# Altium PCB frm-mw-diode-detector.PcbDoc
Units mil, origin at the board's own origin, x right, y up, seen from the top; angles counter-clockwise.
Board outline 1062.99 x 1417.32 mil, 2 copper layers (Top Layer, Bottom Layer), stack 61.756 mil thick; 43 components, 25 nets, 120 pads, 104 vias.
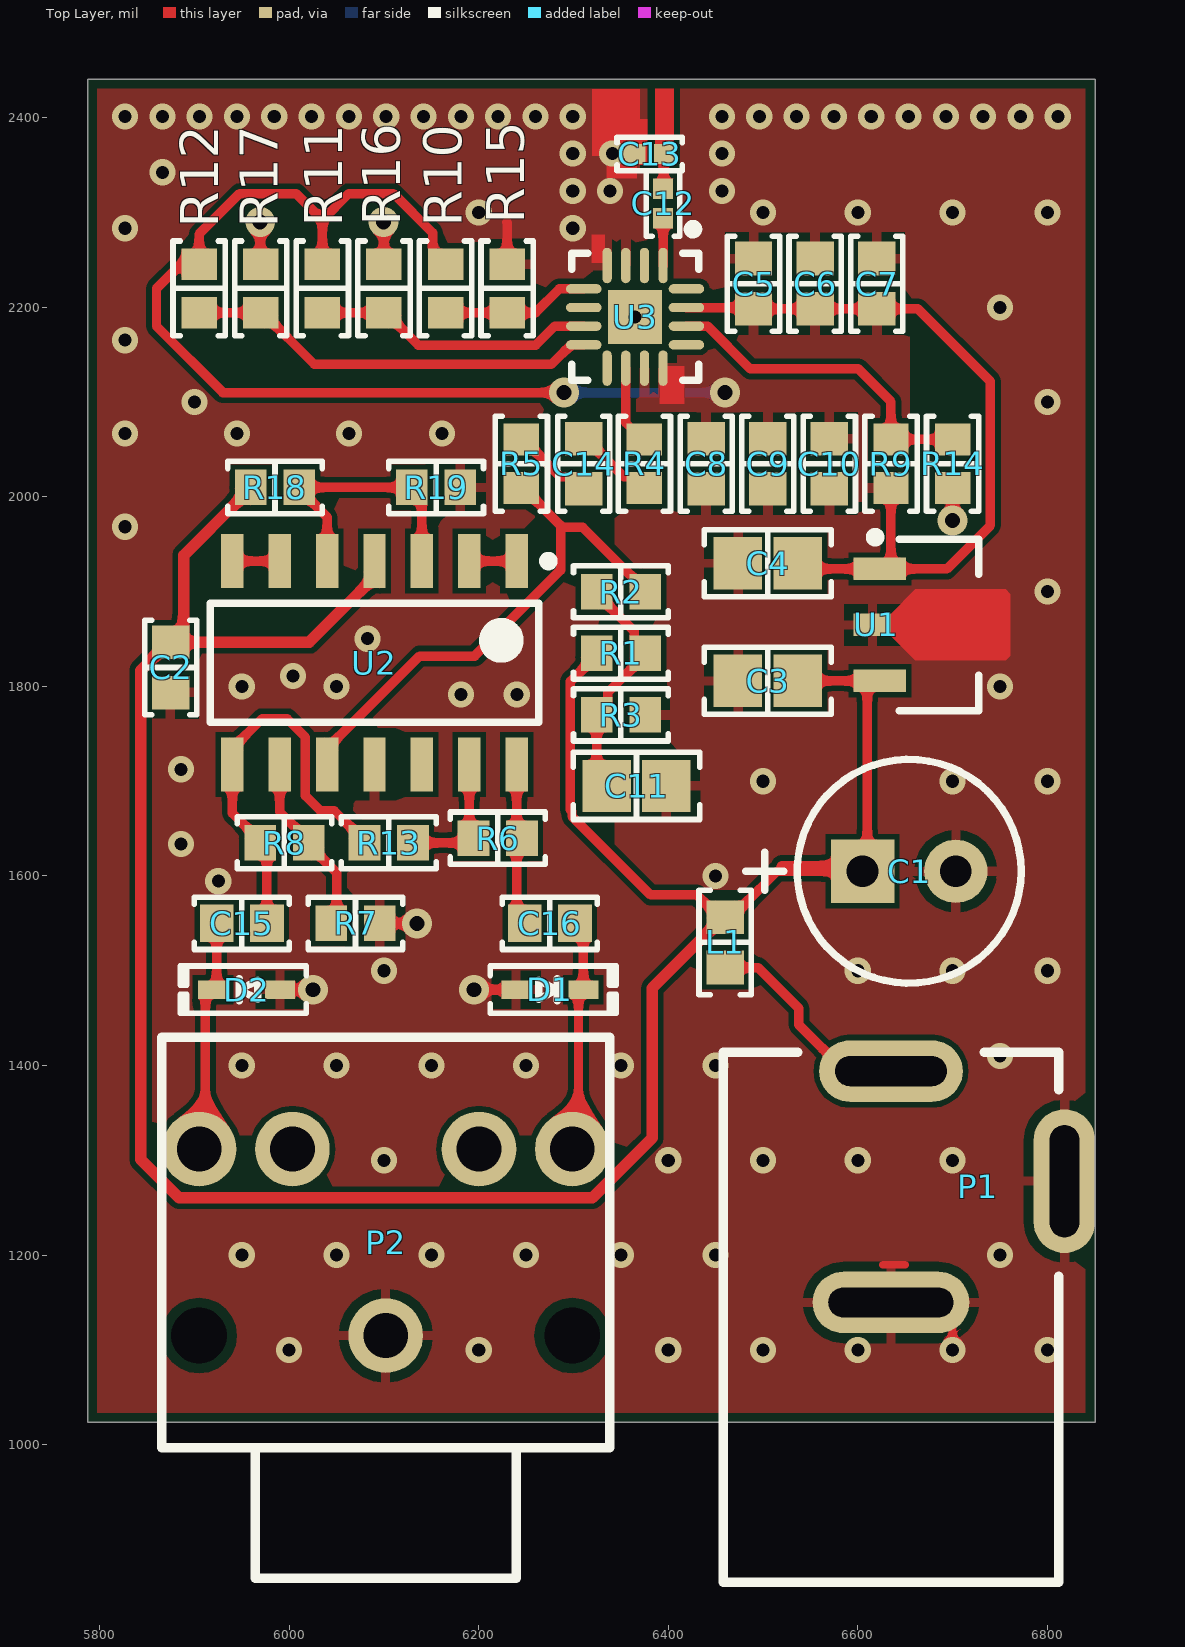
[diagram p0: Top Layer view]
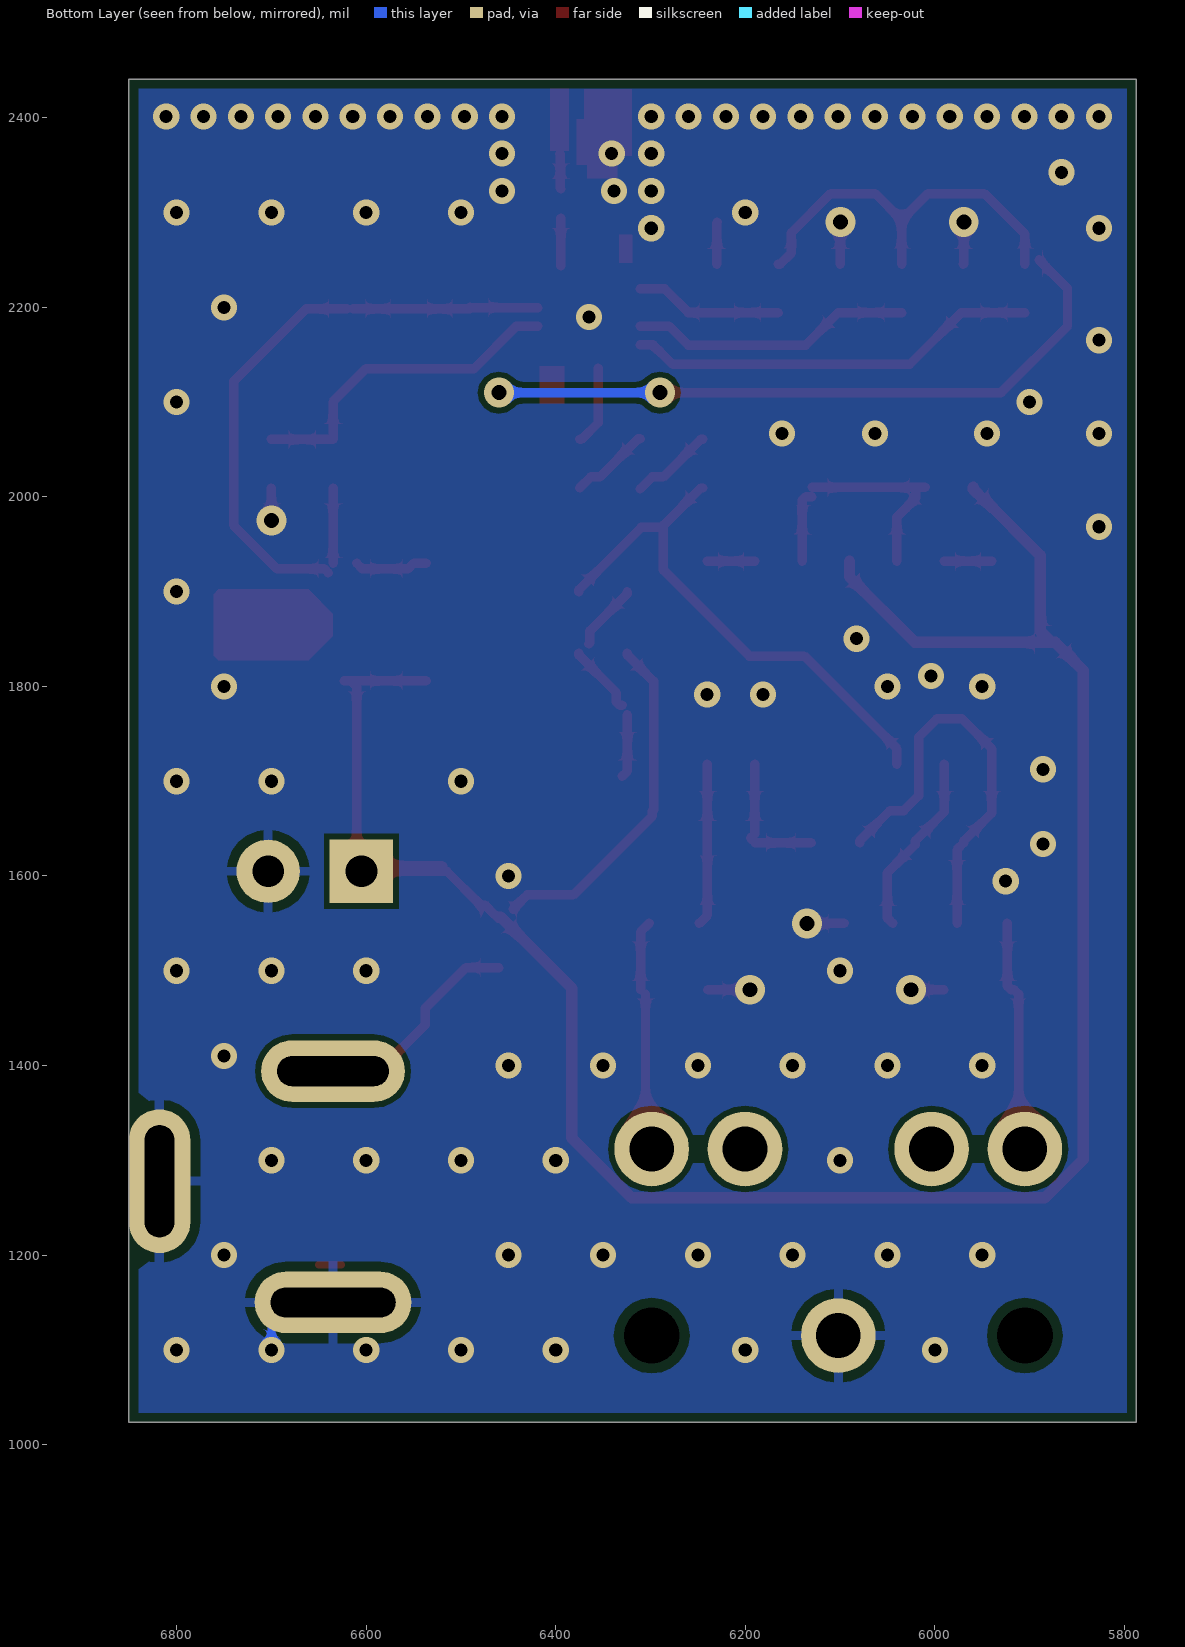
[diagram p1: Bottom Layer view, seen from below]
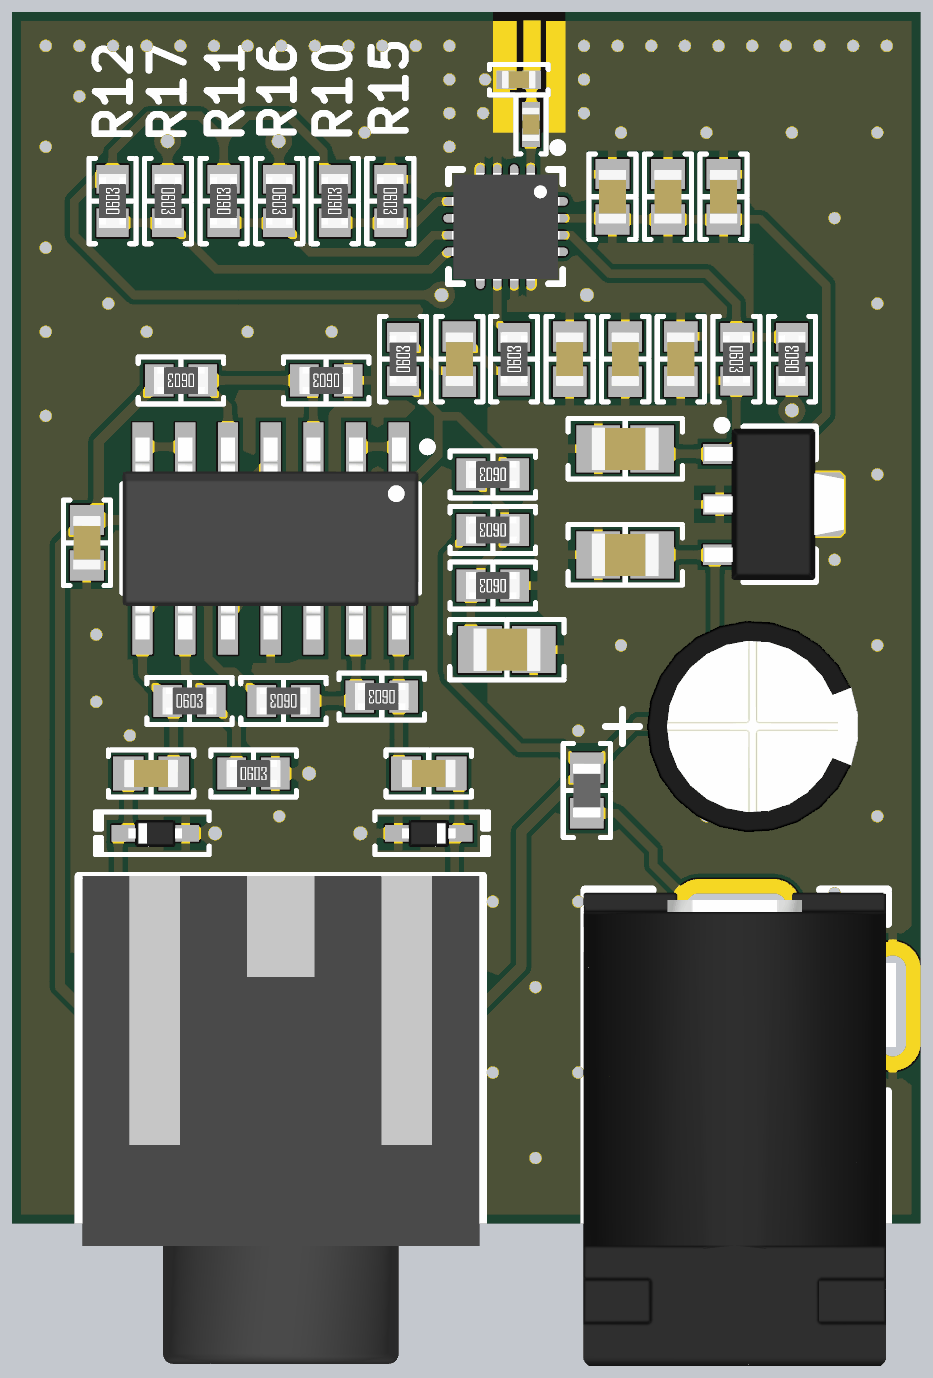
[diagram p2: 3D render of the assembled board from above, using the file's embedded part models]

## Layer stack, top to bottom
Top Solder: solder mask 1, SM-001, Dk 4
Top Layer: signal copper 1.3779
Dielectric 1: core 59, Core-043, Dk 4.3
Bottom Layer: signal copper 1.3779
Bottom Solder: solder mask 1, SM-001, Dk 4

## Board outline
5787.4,1023.62 5787.4,2440.94 6850.39,2440.94 6850.39,1023.62

## Design rules (kind name [scope] priority, off if disabled: settings)
BoardOutlineClearance [All] p1: gap=10 ignorepadtopadclearanceinfootprint=FALSE
Clearance [All] p1: gap=6 ignorepadtopadclearanceinfootprint=TRUE
FanoutControl Fanout_LCC [All] p1 off: bgadir=Out bgaviamode=Centered fanoutstyle=Auto fanoutdirection=Alternating viagrid=1 // Protel DXP Scope 1 Expression Was: IsLCC   Fanout_LCC (Default Rule)
FanoutControl Fanout_BGA [All] p2 off: bgadir=Out bgaviamode=Centered fanoutstyle=Auto fanoutdirection=Alternating viagrid=1 // Protel DXP Scope 1 Expression Was: IsBGA   Fanout_BGA (Default Rule)
FanoutControl Fanout_SOIC [All] p3 off: bgadir=Out bgaviamode=Centered fanoutstyle=Auto fanoutdirection=Alternating viagrid=1 // Protel DXP Scope 1 Expression Was: IsSOIC   Fanout_SOIC (Default Rule)
FanoutControl Fanout_Default [All] p4: bgadir=Out bgaviamode=Centered fanoutstyle=Auto fanoutdirection=Alternating viagrid=1 // Fanout_Default (Default Rule)
FanoutControl Fanout_Small [All] p5 off: bgadir=Out bgaviamode=Centered fanoutstyle=Auto fanoutdirection=Alternating viagrid=1 // Protel DXP Scope 1 Expression Was: (CompPinCount < 5)   Fanout_Small (Default Rule)
HoleSize [All] p1: absolutevalues=TRUE maxlimit=248.03 minlimit=11.81 maxpercent=80.000 minpercent=20.000
HoleToHoleClearance HoleToHoleClearanceVia [IsVia vs IsVia] p1: gap=8 allowstackedmicrovias=TRUE
HoleToHoleClearance [not IsVia vs not IsVia] p2: gap=10 allowstackedmicrovias=TRUE
MinimumAnnularRing [All] p1: minimumring=6
MinimumSolderMaskSliver [All] p1 off: minsoldermaskwidth=8
PolygonConnect [All] p1: thpad.connectstyle=Relief thpad.reliefconductorwidth=10 thpad.reliefentries=4 thpad.polygonreliefangle="90 Angle" thpad.airgapwidth=10 smdpad.connectstyle=Relief smdpad.reliefconductorwidth=10 smdpad.reliefentries=4 smdpad.polygonreliefangle="90 Angle" smdpad.airgapwidth=10 via.connectstyle=Direct via.reliefconductorwidth=10 via.reliefentries=4 via.polygonreliefangle="90 Angle" via.airgapwidth=10
RoomDefinition frm-mw-diode-detector [InComponentClass('frm-mw-diode-detector')] p1: confinementstyle=ConfineIn formatcopy=TRUE lockcomponents=FALSE outline 0,0 2000,0 2000,1000 0,1000
RoutingVias [All] p1: holewidth=15.75 width=31.5 viastyle="Through Hole" minholewidth=13.78 minwidth=27.56 maxholewidth=39.37 maxwidth=50
SilkToSilkClearance [All] p1: silktosilkclearance=7.87
SilkToSolderMaskClearance [All] p1 off: minsilkscreentomaskgap=10 clearancetoexposedcopper=TRUE // Protel DXP Scope 1 Expression Was: IsPad
SolderMaskExpansion [All] p1: expansion=2
UnRoutedNet [All] p1: checkbadconnections=TRUE
Width [All] p1: maxlimit=200 minlimit=6 preferedwidth=8
19 further rules are at their usual default settings.

## Classes and differential pairs
component class frm-mw-diode-detector: C1 C2 C3 C4 C5 C6 C10 C11 C14 C16 D1 D2 L1 P1 P2 R1 R2 R3 R4 R5 R6 R7 R9 R10 R13 R14 R15 R17 R18 U1 U2 U3

## Components (designator, comment, footprint, x,y, rotation, side; value= is the part's Value field where it differs from the comment)
C1 "220uF" 3924B366-8672-45E9-B0BE-62DACC24E783 6605,1605 r0 top
C2 "100nF" "CAP 0603_1608" 5875,1820 r90 top
C3 "10uF" "CAP 0805_2012" 6505,1805.94 r0 top
C4 "10uF" "CAP 0805_2012" 6505,1930 r0 top
C5 "10pF" "CAP 0603_1608" 6490,2225 r90 top
C6 "100pF" "CAP 0603_1608" 6555,2225 r90 top
C7 "1nF" "CAP 0603_1608" 6620,2225 r90 top
C8 "10pF" "CAP 0603_1608" 6440,2035 r270 top
C9 "100pF" "CAP 0603_1608" 6505,2035 r270 top
C10 "1nF" "CAP 0603_1608" 6570,2035 r270 top
C11 "10uF" "CAP 0805_2012" 6366.5,1695 r0 top
C12 "0.1pF" "CAP 0402_1005 RF" 6394.61,2309.61 r270 top
C13 "0.1pF" "CAP 0402_1005 RF" 6380.35,2362 r0 top
C14 "100nF" "CAP 0603_1608" 6310.87,2035 r270 top
C15 "100nF" "CAP 0603_1608" 5950,1550 r180 top
C16 "100nF" "CAP 0603_1608" 6275,1550 r0 top
D1 "3.3V" SOD523F 6275,1480 r0 top
D2 "3.3V" SOD523F 5955,1480 r180 top
L1 "BLM18BD252SN1D" "FER 0603_1608" 6460,1530 r90 top
P1 "DC-005A-20A" F0972D8A-C5C0-4A84-836D-A9666EE65C2D 6635,1394.09 r90 top
P2 "PJ-3900-04" 7EF2B92C-0FC9-4C85-B662-5CEC65BFCCC4 6101.85,1115 r90 top
R1 "1K" "RES 0603_1608" 6350,1835 r180 top
R2 "100K" "RES 0603_1608" 6350,1900 r180 top
R3 "1K" "RES 0603_1608" 6350,1770 r180 top
R4 "0" "RES 0603_1608" 6374.84,2035 r90 top
R5 "10K" "RES 0603_1608" 6245,2035 r90 top
R6 "10K" "RES 0603_1608" 6220,1640 r180 top
R7 "10K" "RES 0603_1608" 6070,1550 r0 top
R8 "100K" "RES 0603_1608" 5995,1635 r0 top
R9 "10K" "RES 0603_1608" 6635,2035 r270 top
R10 "10K" "RES 0603_1608" 6165,2220 r90 top
R11 "10K" "RES 0603_1608" 6035,2220 r90 top
R12 "10K" "RES 0603_1608" 5905,2220 r90 top
R13 "100K" "RES 0603_1608" 6105,1635 r180 top
R14 "10K" "RES 0603_1608" 6700,2035 r90 top
R15 "10K" "RES 0603_1608" 6230,2220 r270 top
R16 "10K" "RES 0603_1608" 6100,2220 r270 top
R17 "10K" "RES 0603_1608" 5970,2220 r270 top
R18 "1K" "RES 0603_1608" 5985,2010 r180 top
R19 "1K" "RES 0603_1608" 6155,2010 r180 top
U1 "AS78L05RTR-E1" E733EFB9-FE91-4AE9-9197-29251971C3DC 6695,1865 r0 top
U2 "LM324DT" 34355DA5-B1DA-47C2-A88A-ECF82120A4F7 6090,1825 r270 top
U3 "LTC5564HUD" 1C9CA8C2-7F7E-4E2B-A488-6DD37E6BADEA 6365,2190 r270 top

## Footprints (in the part's own frame and the unit in brackets; to place one, negate y for a bottom-side part, rotate by r counter-clockwise, add the part's x,y. Pads: shape width x height; smd on the part's side, far side on the other; paste and mask are expansions set on the pad)
1C9CA8C2-7F7E-4E2B-A488-6DD37E6BADEA [mm] "QFN, 16-Leads, Body 3.00x3.00mm, Pitch 0.50mm, Thermal Pad 1.45x1.45mm, IPC Medium Density"
  oval 0.95x0.25 smd: 1(-1.375,0.75) 2(-1.375,0.25) 3(-1.375,-0.25) 4(-1.375,-0.75) 9(1.375,-0.75) 10(1.375,-0.25) 11(1.375,0.25) 12(1.375,0.75)
  oval 0.25x0.95 smd: 5(-0.75,-1.375) 6(-0.25,-1.375) 7(0.25,-1.375) 8(0.75,-1.375) 13(0.75,1.375) 14(0.25,1.375) 15(-0.25,1.375) 16(-0.75,1.375)
  rect 1.45x1.45 smd: 17(0,0)
  silkscreen extent -2.47,-1.7 1.7,1.7, body extent -1.6,-1.6 1.6,1.6, height 0.8
7EF2B92C-0FC9-4C85-B662-5CEC65BFCCC4 [mm]
  round 0 hole 1.5 unplated: 1(0,5) 1(0,-5)
  round 2 hole 1.2: 1(0,0) 2(5,5) 3(5,-5) 4(5,2.5) 5(5,-2.5)
  silkscreen extent -6.5,-6 8,6, body extent -6.5,-5.9 8,5.9, height 9
3924B366-8672-45E9-B0BE-62DACC24E783 [mm]
  rect 1.7x1.7 hole 0.85: 1(0,0)
  round 1.7 hole 0.85: 2(2.5,0)
  silkscreen extent -3.13,-3 4.25,3, body extent -1.9,-3.15 4.4,3.15, height 11
34355DA5-B1DA-47C2-A88A-ECF82120A4F7 [mm] "SOIC, 14-Leads, Body 8.65x3.90mm, Pitch 1.27mm, IPC Medium Density"
  rect 1.45x0.6 smd: 1(-2.725,3.81) 2(-2.725,2.54) 3(-2.725,1.27) 4(-2.725,0) 5(-2.725,-1.27) 6(-2.725,-2.54) 7(-2.725,-3.81) 8(2.725,-3.81) 9(2.725,-2.54) 10(2.725,-1.27) 11(2.725,0) 12(2.725,1.27) 13(2.725,2.54) 14(2.725,3.81)
  silkscreen extent -2.85,-4.4 1.6,4.79, body extent -3,-4.4 3,4.4, height 1.75
"CAP 0402_1005 RF" [mm] "Chip Capacitor, 2-Leads, Body 1.02x0.51mm, IPC High Density"
  rect 0.55x0.54 smd: 1(-0.39,0) 2(0.39,0)
  silkscreen extent -0.87,-0.45 0.87,0.45, body extent -0.5,-0.26 0.5,0.26, height 0.52
"CAP 0603_1608" [mm] "Chip Capacitor, 2-Leads, Body 1.60x0.80mm, IPC Medium Density"
  rect 0.9x1 smd: 1(-0.675,0) 2(0.675,0)
  silkscreen extent -1.27,-0.7 1.27,0.7, body extent -0.8,-0.41 0.8,0.41, height 0.82
"CAP 0805_2012" [mm] "Chip Capacitor, 2-Leads, Body 2.00x1.20mm, IPC Medium Density"
  rect 1.3x1.4 smd: 1(-0.8,0) 2(0.8,0)
  silkscreen extent -1.7,-0.9 1.7,0.9, body extent -1,-0.64 1,0.64, height 1.26
E733EFB9-FE91-4AE9-9197-29251971C3DC [mm]
  rect 1.4x0.6 smd: 1(-1.823,1.5) 3(-1.823,-1.5)
  rect 1x0.6 smd: 2(-2.023,0)
  Top Layer region: -1.523,0.3 -0.873,0.95 1.552,0.95 1.678,0.825 1.678,-0.825 1.552,-0.95 -0.873,-0.95 -1.523,-0.3
  silkscreen extent -2.07,-2.3 0.83,2.47, body extent -2.47,-2.25 1.68,2.25, height 1.5
F0972D8A-C5C0-4A84-836D-A9666EE65C2D [mm]
  oval 1.65x3.85 hole 0.8 slot 3 at 90 deg: 1(0,0)
  oval 1.65x4.2 hole 0.8 slot 3.35 at 90 deg: 2(-6.2,0)
  oval 3.85x1.65 hole 0.8 slot 3 at 0 deg: 3(-2.95,-4.65)
  silkscreen extent -13.7,-4.5 0.5,4.5, body extent -13.67,-4.75 0.43,4.55, height 10.9
"FER 0603_1608" [mm] "Chip Ferrite, 2-Leads, Body 1.60x0.80mm, IPC Medium Density"
  rect 0.9x1 smd: 1(-0.675,0) 2(0.675,0)
  silkscreen extent -1.4,-0.7 1.4,0.7, body extent -0.8,-0.41 0.8,0.41, height 0.82
"RES 0603_1608" [mm] "Chip Resistor, 2-Leads, Body 1.60x0.80mm, IPC Medium Density"
  rect 0.85x0.95 smd: 1(-0.65,0) 2(0.65,0)
  silkscreen extent -1.27,-0.7 1.27,0.7, body extent -0.8,-0.4 0.8,0.4, height 0.45
SOD523F [mm] "SODFL, 2-Leads, Body 0.80x1.60mm, IPC Medium Density"
  rect 0.8x0.5 smd: 1(0.9,0) 2(-0.9,0)
  silkscreen extent -1.6,-0.64 1.8,0.64, body extent -0.8,-0.4 0.8,0.4, height 0.65

## Part data
C1: library part 1a28df19-6d3e-4a71-836c-f22920f8e8ab, "CAP  THT ELEC 220uF 25V 20%", Manufacturer 1=Rubycon, Manufacturer Part Number 1=25PK220MEFC-6.3*11, ComponentLink1Description=Datasheet, ComponentLink1URL="http://localhost:8080/static/files/Rubycon-220uF-25V_C109337_12019-03-10_214953.757848.pdf?Rubycon-220uF-25V_C109337 (1).pdf", id=14782, Part Number=1a28df19-6d3e-4a71-836c-f22920f8e8ab
C2 C14 C15 C16: library part 02841f84-ac15-41b5-9e17-915f8f067828, "CAP SMD MLCC 100nF 25V 0603 X7R", Manufacturer 1="Samsung Electro-Mechanics", Manufacturer Part Number 1=CL10B104KA8NNNC, ComponentLink1Description=Datasheet, ComponentLink1URL=http://localhost:8080/static/files/Samsung-Electro-Mechanics-CL10B104KA8NNNC_C15902019-03-10_215548.826887.pdf?Samsung-Electro-Mechanics-CL10B104KA8NNNC_C1590.pdf, id=14784, Part Number=02841f84-ac15-41b5-9e17-915f8f067828
C3 C4 C11: library part 1ffbe5a9-0884-4740-bdad-20a6a98400e6, "CAP SMD MLCC 10uF 25V 0805 X5R", Manufacturer 1="Samsung Electro-Mechanics", Manufacturer Part Number 1=CL21A106KAYNNNE, ComponentLink1Description=Datasheet, ComponentLink1URL=http://localhost:8080/static/files/Samsung-Electro-Mechanics-CL21A106KAYNNNE_C158502019-03-10_213827.610739.pdf?Samsung-Electro-Mechanics-CL21A106KAYNNNE_C15850.pdf, id=14779, Part Number=1ffbe5a9-0884-4740-bdad-20a6a98400e6
C5 C8: library part b659b677-71ac-4e84-9ac8-47a475f18d31, "CAP SMD MLCC 10pF 50V 0603 C0G/NP0", Manufacturer 1=Yageo, Manufacturer Part Number 1=CC0603GRNPO9BN100, id=14805, Part Number=b659b677-71ac-4e84-9ac8-47a475f18d31
C6 C9: library part ccf679fd-1b09-4431-be81-04c3ce295510, "CAP SMD MLCC 100pF 100V 0603 C0G/NP0", Manufacturer 1=Yageo, Manufacturer Part Number 1=CC0603JRNPO0BN101, id=14804, Part Number=ccf679fd-1b09-4431-be81-04c3ce295510
C7 C10: library part 0eca2548-3630-4fea-a3d5-94248c1cae74, "CAP SMD MLCC 1nF 50V 0603 X7R", Manufacturer 1="Samsung Electro-Mechanics", Manufacturer Part Number 1=CL10B102KB8NNNC, ComponentLink1Description=Datasheet, ComponentLink1URL="http://localhost:8080/static/files/Samsung-Electro-Mechanics-CL10B102KB8NNNC_C1588_12019-03-10_215732.131818.pdf?Samsung-Electro-Mechanics-CL10B102KB8NNNC_C1588 (1).pdf", id=14785, Part Number=0eca2548-3630-4fea-a3d5-94248c1cae74
C12 C13: library part 26a1b8a5-3146-4e38-b8a1-20cf4d8b229c, "CAP SMD MLCC 0.1pF 50V 0402 HIGH-Q", Manufacturer 1=Murata, Manufacturer Part Number 1=GJM1555C1HR10BB01D, id=14808, Part Number=26a1b8a5-3146-4e38-b8a1-20cf4d8b229c
D1 D2: library part d6266fd0-7428-4fb9-a062-338cdce926fd, "DIODE SMD TVS 3.3V BIDIRECTIONAL SOD-523", Manufacturer 1="Born Semiconductor", Manufacturer Part Number 1=PESD3V3S1BA-N, ComponentLink1Description=Datasheet, ComponentLink1URL=http://localhost:8080/static/files/Bourne-Semicon-Shenzhen-PESD3V3S1BA-N_C3160372019-04-07_002431.794112.pdf?Bourne-Semicon-Shenzhen-PESD3V3S1BA-N_C316037.pdf, id=14798, Part Number=d6266fd0-7428-4fb9-a062-338cdce926fd
L1: library part c9e30ae8-9d5b-4135-a079-b1147da846d8, "FER SMD CHIP 0603 400mA 1k@100MHz 500mOhm", Manufacturer 1=Murata, ComponentLink1Description=Datasheet, ComponentLink1URL=http://localhost:8080/static/files/Murata-Electronics-BLM18AG102SN1D_C858242019-03-10_220021.186607.pdf?Murata-Electronics-BLM18AG102SN1D_C85824.pdf, id=14786, Manufacturer Part Number 1=BLM18BD252SN1D, Part Number=c9e30ae8-9d5b-4135-a079-b1147da846d8
P1: library part b53db51a-1725-412b-9039-fa7a45c7c438, "CONN THT DC JACK 0.5A 30VDC 5Kcycles", Manufacturer 1="HRO Electronics", ComponentLink1Description=Datasheet, ComponentLink1URL="http://localhost:8080/static/files/Korean-Hroparts-Elec-DC-005A-20A_C191049_22019-03-10_214231.486078.pdf?Korean-Hroparts-Elec-DC-005A-20A_C191049 (2).pdf", id=14780, Manufacturer Part Number 1=DC-005A-20A, Part Number=b53db51a-1725-412b-9039-fa7a45c7c438
P2: library part 80507a24-5d7c-4cf5-953e-f54832d54564, "CONN THT 3.5mm AUDIO STEREO AUX SWITCH", Manufacturer 1="HRO Electronics", ComponentLink1Description=Datasheet, ComponentLink1URL=http://localhost:8080/static/files/Korean-Hroparts-Elec-PJ-3900-04_C1518392019-04-10_231144.687617.pdf?Korean-Hroparts-Elec-PJ-3900-04_C151839.pdf, id=14793, Manufacturer Part Number 1=PJ-3900-04, Part Number=80507a24-5d7c-4cf5-953e-f54832d54564
R1 R3 R18 R19: library part a678220f-9e9d-4863-a833-9993504f723c, "RES SMD 1K OHM 1% 1/10W 0603", Manufacturer 1=Yageo, Manufacturer Part Number 1=RC0603FR-071KL, id=14794, Part Number=a678220f-9e9d-4863-a833-9993504f723c
R2 R8 R13: library part 76af10b3-9d85-4b5c-a2d6-26cc74f432f7, "RES SMD 100K OHM 1% 1/10W 0603", Manufacturer 1=Yageo, Manufacturer Part Number 1=RC0603FR-07100KL, id=12746, Part Number=76af10b3-9d85-4b5c-a2d6-26cc74f432f7
R4: library part 6ae227f9-847f-4766-8522-e11a83531204, "RES SMD 0 OHM 5% 1/10W 0603", Manufacturer 1=Yageo, Manufacturer Part Number 1=RC0603JR-070RL, id=11973, Part Number=6ae227f9-847f-4766-8522-e11a83531204
R5 R6 R7 R9 R10 R11 R12 R14 R15 R16 R17: library part 93242766-ba1d-462d-b58f-ce1dfc4129c8, "RES SMD 10K OHM 1% 1/10W 0603", Manufacturer 1=Yageo, Manufacturer Part Number 1=RC0603FR-0710KL, id=12101, Part Number=93242766-ba1d-462d-b58f-ce1dfc4129c8
U1: library part fd64863e-487f-4688-b264-696c0ba5456b, "IC SMD LINEAR VOLTAGE REGULATOR 5V 100mA SOT-89", Manufacturer 1="Diodes Inc.", Manufacturer 2="KIA Semicon Tech", Manufacturer Part Number 2=KIA78L05T, ComponentLink1Description=Datasheet, ComponentLink1URL="http://localhost:8080/static/files/Diodes-Incorporated-AS78L05RTR-E1_C90471_12019-03-10_215252.941962.pdf?Diodes-Incorporated-AS78L05RTR-E1_C90471 (1).pdf", ComponentLink2Description=Datasheet, ComponentLink2URL="http://localhost:8080/static/files/KIA-Semicon-Tech-KIA78L05T_C90763_12019-03-10_215415.523371.pdf?KIA-Semicon-Tech-KIA78L05T_C90763 (1).pdf", id=14783, Manufacturer Part Number 1=AS78L05RTR-E1, Part Number=fd64863e-487f-4688-b264-696c0ba5456b
U2: library part 21a85167-c328-42f7-a52e-365842c6dad3, "IC SMD OPAMP LM324DT SO-14", Manufacturer 1="ST Microelectronics", ComponentLink1Description=Datasheet, ComponentLink1URL=http://localhost:8080/static/files/STMicroelectronics-LM324DT_C710352019-04-06_191500.254110.pdf?STMicroelectronics-LM324DT_C71035.pdf, id=14792, Manufacturer Part Number 1=LM324DT, Part Number=21a85167-c328-42f7-a52e-365842c6dad3
U3: library part 45536c7f-5716-49d5-adce-f87923efcc45, "IC SMD RF POWER DETECTOR 15GHz LTC5564 QFN-16", Manufacturer 1="Analog Devices / Linear Technology", Manufacturer Part Number 2=LTC5564IUD, ComponentLink1Description=Datasheet, ComponentLink1URL=http://localhost:8080/static/files/5564fc2019-04-28_163050.562654.pdf?5564fc.pdf, id=14803, Manufacturer 2="Analog Devices / Linear Technology", Manufacturer Part Number 1=LTC5564HUD, Part Number=45536c7f-5716-49d5-adce-f87923efcc45

## Via types
v1: diameter 27.56, hole 13.78, Top Layer to Bottom Layer, tented both sides, 96 vias
v2: diameter 31.5, hole 15.75, Top Layer to Bottom Layer, tented both sides, 8 vias

## Nets (pads, with @x,y where several pads share a name; then routed paths per layer and width w, separated by ;. In a path a pad name is that pad's centre, name@x,y a point inside that pad or via, vN(x,y) a via of type N, cw(c..) or ccw(c..) an arc to the next point about the centre after c; other vN are vias at no path point)
+5V: C4.2 C5.1 C6.1 C7.1 C8.1 C9.1 C10.1 R9.2 R10.2 R11.2 R12.2 U1.1 U3.11 U3.12 U3.15 | length 1917.7
  Top Layer w10: R12.2@5890,2250 5860,2220 5860,2180 5930,2110 v2(6290,2110) v2@6285.89,2105.89 ; R12.2 5905,2277.32 5947.68,2320 6007.19,2320 6035,2292.19 ; R11.2 6035,2292.19 ; R10.2 6163.03,2245.59 6151.3,2257.32 6151.3,2278.7 6110,2320 6062.81,2320 6035,2292.19 ; U3.15 6489.84,2199.84 6490,2200 C5.1 C6.1 C7.1@6613.43,2198.43 ; C4.2 6550,1930 6555.94,1924.06 6604.06,1924.06 U1.1@6610,1930 ; C7.1 6663.43,2198.43 6740,2121.85 6740,1970 6694.06,1924.06 6644.06,1924.06 U1.1@6640,1920 ; U1.1@6635,1930 R9.2
  Bottom Layer w10: v2(6290,2110) v2(6460,2110)
+5V_RX: U2.12
+12V: C1.1 C2.2 C3.2 L1.2 R1.2 R18.2 U1.3 U2.4 | length 2759.8
  Top Layer w10: R1.2 6324.41,1833.03 6296.68,1805.3 6296.68,1670 6298.41,1668.27 6298.41,1662.88 6381.29,1580 6430,1580 L1.2@6445,1565 ; L1.2@6465,1559.61 6474.69,1569.29 6479.29,1569.29 6515,1605 6520,1605 6590,1605 C1.1 ; C3.2 U1.3@6616.81,1805.94 ; C1.1@6610,1605 6610,1799.13 U1.3@6616.81,1805.94 ; U1.3 U1.3@6616.81,1805.94
  Top Layer w12: C2.2 C2.2@5873.03,1846.57 ; C2.2@5876.97,1846.57 5888.69,1858.29 5888.69,1938.29 5947.69,1997.3 5948.68,1997.3 5959.41,2008.03 R18.2 ; U2.4 6090,1915.55 6021.02,1846.57 C2.2@5873.03,1846.57 ; L1.2 6458.03,1556.57 6383.15,1481.69 6383.15,1323.65 6319.98,1260.48 5883.72,1260.48 5843.31,1300.89 5843.31,1816.86 C2.2@5873.03,1846.57 ; 6520,1610 C1.1@6590,1610
ANTENNA: C12.1 C13.2 | length 37.5
  Top Layer w10: C12.1 6395.16,2325.51 6395.16,2361.45 C13.2
GND: C1.2 C2.1 C3.1 C4.1 C5.2 C6.2 C7.2 C8.2 C9.2 C10.2 C11.2 C13.1 D1.2 D2.2 P1.2 P1.3 P2.1 R3.1 R7.2 R14.1 R15.1 R16.1 R17.1 R19.1 U1.2 U2.11 U3.3 U3.4 U3.17 | length 391.2
  Top Layer w8: 6626.31,1190 6650.2,1190 ; v1(6700,1100) P1.2@6700,1140.2
  Top Layer w10: v2(5969.41,2290) 5969.41,2246.18 R17.1 ; D2.2 v2(6025,1480) ; R7.2 v2(6135,1550) ; v2(6099.41,2290) 6100,2289.41 R16.1 ; v2(6195,1480) D1.2 ; 6229.41,2290 6230,2289.41 R15.1 ; v2(6700,1975) R14.1
  Bottom Layer w8: v1(6700,1100) P1.2@6700,1140.2
  other v1: 6000,1100 6200,1100 6400,1100 6500,1100 6600,1100 6800,1100 5950,1200 6050,1200 6150,1200 6250,1200 6350,1200 6450,1200 6750,1200 6100,1300 6400,1300 6500,1300 6600,1300 6700,1300 5950,1400 6050,1400 6150,1400 6250,1400 6350,1400 6450,1400 6750,1410 6100,1500 6600,1500 6700,1500 6800,1500 5925.2,1594.49 6450,1600 5885.83,1633.86 6500,1700 6700,1700 6800,1700 5885.83,1712.6 6181.1,1791.34 6240.16,1791.34 5950,1800 6050,1800 6750,1800 6003.94,1811.02 6082.68,1850.39 6800,1900 5826.77,1968.5 5826.77,2066.93 5944.88,2066.93 6062.99,2066.93 6161.42,2066.93 5900,2100 6800,2100 5826.77,2165.35 6365,2190 6750,2200 5826.77,2283.46 6299.21,2283.46 6200,2300 6500,2300 6600,2300 6700,2300 6800,2300 6299.21,2322.83 6338.58,2322.83 6456.69,2322.83 5866.14,2342.52 5866.14,2342.52 6299.21,2362.2 6340.94,2362.2 6456.69,2362.2 5826.77,2401.57 5866.14,2401.57 5905.51,2401.57 5944.88,2401.57 5984.25,2401.57 6023.62,2401.57 6062.99,2401.57 6102.36,2401.57 6141.73,2401.57 6141.73,2401.57 6181.1,2401.57 6220.47,2401.57 6259.84,2401.57 6299.21,2401.57 6456.69,2401.57 6496.06,2401.57 6535.43,2401.57 6535.43,2401.57 6574.8,2401.57 6614.17,2401.57 6614.17,2401.57 6653.54,2401.57 6692.91,2401.57 6732.28,2401.57 6771.65,2401.57 6811.02,2401.57
NetC11_1: C11.1 R1.1 R2.2 R3.2 | length 214.4
  Top Layer w10: R3.2 6324.41,1710.59 C11.1@6330,1705 ; R2.2 6324.41,1898.03 6363.86,1858.58 6363.86,1846.14 R1.1@6365,1845 ; R3.2@6330,1780 6332.44,1780 6336.14,1783.7 6336.14,1793.58 6375.59,1833.03 R1.1
NetC12_2: C12.2 U3.1 | length 50.2
  Top Layer w10: U3.1 6394.61,2244.21 C12.2
NetC14_1: C14.1 R4.1 | length 85.6
  Top Layer w10: C14.1 6312.83,2061.57 6353.27,2021.14 6363.11,2021.14 R4.1
NetC14_2: C14.2 R5.2 | length 87.5
  Top Layer w10: R5.2 6246.97,2060.59 6286.42,2021.14 6298.15,2021.14 C14.2
NetC15_1: C15.1 R8.1 R13.2 U2.8 | length 443.6
  Top Layer w10: C15.1 5976.57,1627.84 R8.1 5969.41,1636.97 5940,1666.38 U2.8 5940,1734.45 5971.41,1765.86 5997.77,1765.86 6017.19,1746.44 6017.19,1684.62 6032.96,1668.85 6047.53,1668.85 6079.41,1636.97 R13.2
NetC15_2: C15.2 D2.1 P2.2 | length 236.8
  Top Layer w10: P2.2@5911.57,1320 5911.57,1475.16 5916.42,1480 D2.1 5923.43,1483.86 C15.2
NetC16_1: C16.1 R6.1 U2.14 | length 171.2
  Top Layer w10: U2.14 6240,1558.43 C16.1
NetC16_2: C16.2 D1.1 P2.3 | length 228.8
  Top Layer w10: C16.2 6310.43,1541.14 D1.1 ; P2.3@6305.28,1320 D1.1@6305.28,1475.16
NetL1_1: L1.1 P1.1 | length 205.1
  Top Layer w10: L1.1 6494.69,1503.43 6537.93,1460.18 6537.93,1442.86 6585.79,1395 P1.1@6610,1395
NetR2_1: R2.1 R5.1 U2.10 | length 623.1
  Top Layer w10: U2.10 6040,1734.45 6137.56,1832.01 6195.63,1832.01 6286.38,1922.75 6286.38,1970 R5.1@6246.97,2009.41 ; R2.1 6375.59,1901.97 6309.53,1968.03 6288.35,1968.03 R5.1@6246.97,2009.41 ; R5.1@6246.97,2009.41 R5.1 R5.1@6246.97,2009.41
NetR4_2: R4.2 U3.10 | length 84.6
  Top Layer w10: U3.10 6355.16,2078.31 6372.87,2060.59 R4.2
NetR6_2: R6.2 R13.1 U2.13 | length 145.4
  Top Layer w10: R13.1 6189.41,1635 R6.2 6190,1644.41 U2.13
NetR7_1: R7.1 R8.2 U2.9 | length 194.9
  Top Layer w10: U2.9 5990,1667.56 6020.59,1636.97 R8.2 6020.59,1633.03 6050,1603.62 6050,1555.59 R7.1
NetR9_1: R9.1 R14.2 U3.14 | length 353.9
  Top Layer w10: U3.14 6441.4,2180.16 6486.56,2135 6600.65,2135 6635,2100.65 R9.1 R14.2
NetR10_1: R10.1 R15.2 U3.5 | length 156.3
  Top Layer w10: R10.1 R15.2 6260,2194.41 6285.04,2219.45 6310.79,2219.45 U3.5
NetR11_1: R11.1 R16.2 U3.7 | length 298.5
  Top Layer w10: R11.1 R16.2 6101.97,2194.41 6136.38,2160 6260,2160 6280.08,2180.08 6310.79,2180.08 U3.7
NetR12_1: R12.1 R17.2 U3.8 | length 436.9
  Top Layer w10: R12.1 R17.2 5971.97,2194.41 6026.38,2140 6276.77,2140 6297.24,2160.47 U3.8
NetR18_1: R18.1 R19.2 U2.3 U2.5 | length 281
  Top Layer w10: R18.1@6010,2010 R18.1 R18.1@6020,2010 ; U2.5 6040,1978.62 6020,1998.62 R18.1@6020,2010 ; R19.2 R18.1@6020,2010 ; R19.2@6130,2000 6136.3,2000 6140,1996.3 U2.3
NetU2_1: U2.1 U2.2 | length 50
  Top Layer w10: U2.2 U2.1
NetU2_6: U2.6 U2.7 | length 50
  Top Layer w10: U2.7 U2.6
pads on no net: P2.4 P2.5 U3.2 U3.6 U3.9 U3.13 U3.16

## Polygon pours and split planes (outlines as drawn)
GND on Top Layer "GND_L01_P008" (solid, remove dead copper, pour order 8): 5787.4,2440.94 5787.4,1023.62 6850.39,1023.62 6850.39,1614.17 6377.95,1614.17 6377.95,2440.94
GND on Top Layer "GND_L01_P004" (solid, remove dead copper, pour order 4): 6843.51,2441.44 6343.51,2441.45 6343.51,1585.5 6843.51,1585.5
+5V on Top Layer "+5V_L01_P000" (solid, remove dead copper, pour order 0): 6430,2219.45 6430,2220 6655,2220 6655,1995 6430,1995 6430,2090 6350,2090 6350,2160 6400,2160 6400,2220
GND on Bottom Layer "GND_L02_P006" (solid, remove dead copper, pour order 6): 5787.4,1023.62 6850.39,1023.62 6850.39,2440.94 5787.4,2440.94

## Other copper
Top Layer:
  rectangle net +5V: 6391,2098 6417,2138
  rectangle net GND: 6319,2247 6333,2277
  rectangle net GND: 6351,2350 6378,2399
  rectangle net GND: 6335,2336 6367,2402
  rectangle net ANTENNA: 6386,2365 6406,2431
  region net GND: 6309,2278
  pour cut-out: 6380,2360 6410,2360 6410,2455 6380,2455
  pour cut-out: 6410,2360
  pour cut-out: 6377.95,2362.2
  region net GND: 6320,2360 6320.04,2359.96 6370,2359.96 6370,2430 6320,2430

## Silkscreen, mask and mechanical layers (free items; w line width, h text height)
Top Solder:
  rectangle: 6350,2300 6435,2460.63
Board Outline:
  lines w10: 5787.4,1023.62 5826.77,1023.62 6850.39,1023.62 6850.39,2440.94 5787.4,2440.94 5787.4,1023.62